# Altium PCB NB_BaseStation.PcbDoc
Units mm, origin at the board's own origin, x right, y up, seen from the top; angles counter-clockwise.
Board outline 62 x 30 mm, 2 copper layers (Top Layer, Bottom Layer); 29 components, 24 nets, 54 pads, 21 vias.
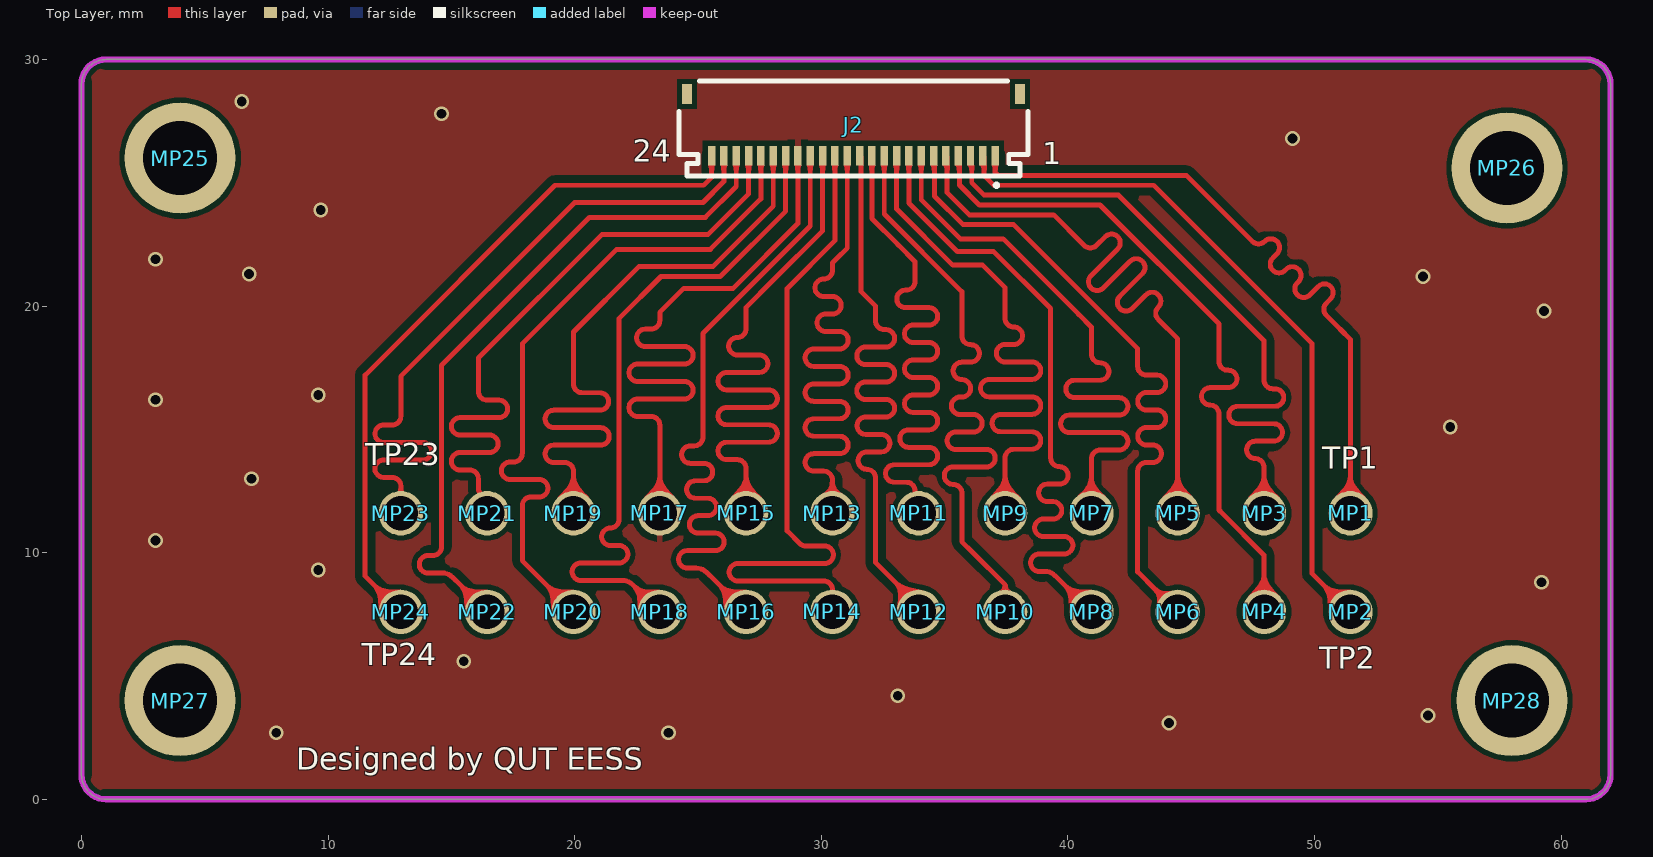
[diagram p0: Top Layer view]
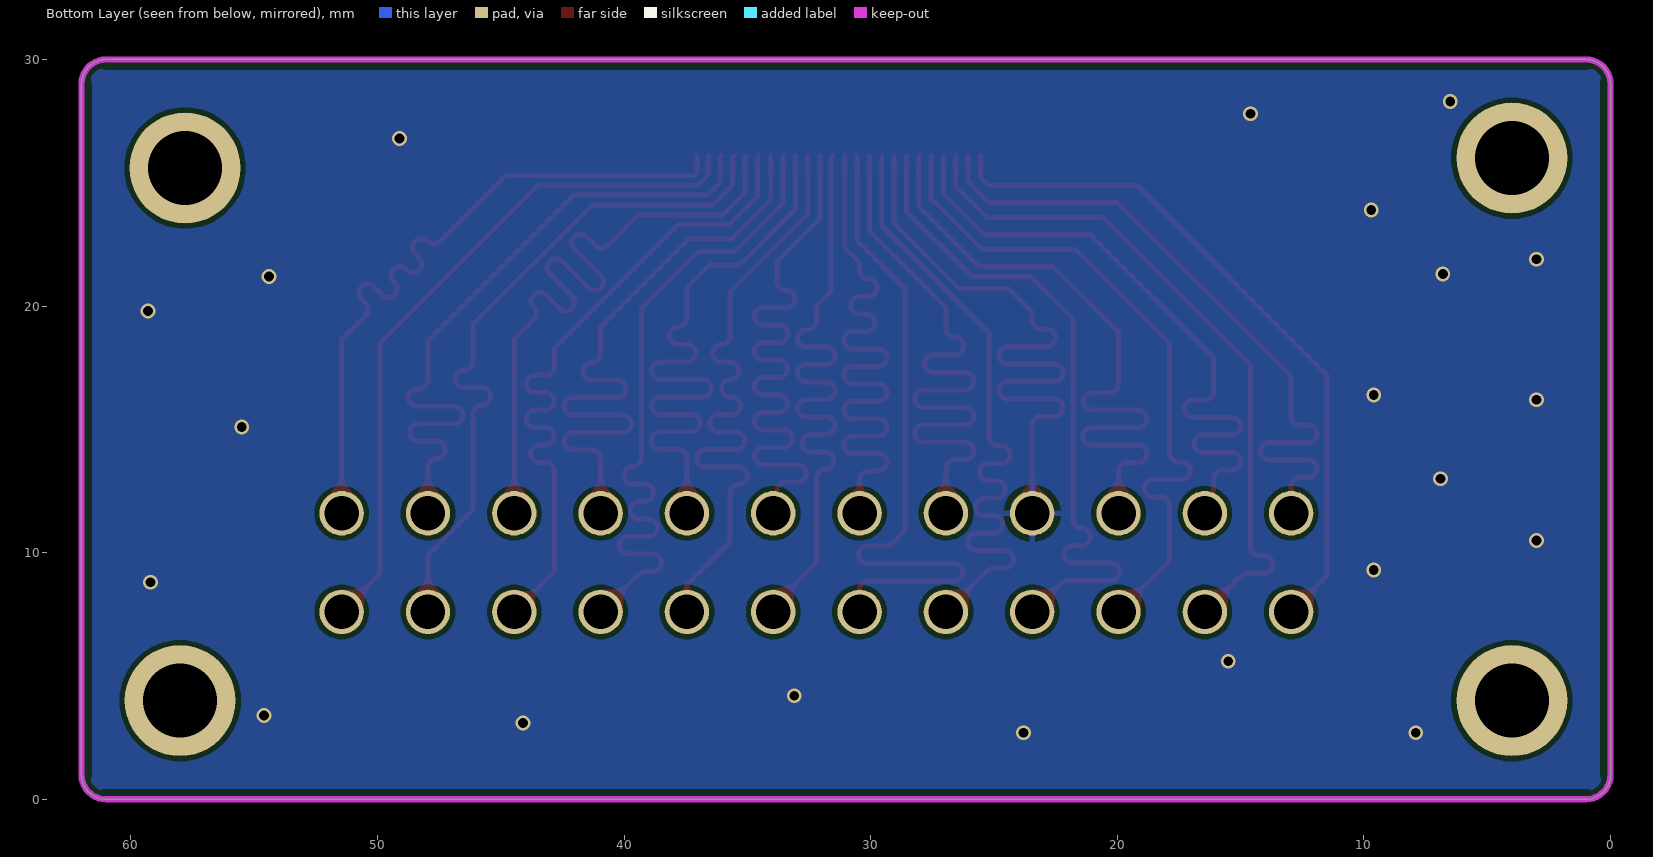
[diagram p1: Bottom Layer view, seen from below]

## Layer stack, top to bottom
Top Solder: solder mask 0.0102, Solder Resist, Dk 3.5
Top Layer: signal copper 0.0356
Dielectric 1: dielectric 0.32, FR-4, Dk 4.8
Bottom Layer: signal copper 0.0356
Bottom Solder: solder mask 0.0102, Solder Resist, Dk 3.5

## Board outline
0,1 ccw(c1,1) 1,0 61,0 ccw(c61,1) 62,1 62,29 ccw(c61,29) 61,30 1,30 ccw(c1,29) 0,29

## Design rules (kind name [scope] priority, off if disabled: settings)
Clearance Clearance_1 [All] p1: gap=0.2 ignorepadtopadclearanceinfootprint=FALSE except(0.3: Track-Poly)
HoleSize [All] p1: absolutevalues=TRUE maxlimit=3 minlimit=0.025 maxpercent=80.000 minpercent=20.000
PolygonConnect [All] p1: thpad.connectstyle=Relief thpad.reliefconductorwidth=0.254 thpad.reliefentries=4 thpad.polygonreliefangle="90 Angle" thpad.airgapwidth=0.254 smdpad.connectstyle=Relief smdpad.reliefconductorwidth=0.254 smdpad.reliefentries=4 smdpad.polygonreliefangle="90 Angle" smdpad.airgapwidth=0.254 via.connectstyle=Direct via.reliefconductorwidth=0.254 via.reliefentries=4 via.polygonreliefangle="90 Angle" via.airgapwidth=0.254
RoutingVias [All] p1: holewidth=0.711 width=1.27 viastyle="Through Hole" minholewidth=0.3 minwidth=0.6 maxholewidth=0.711 maxwidth=1.27
SilkToSolderMaskClearance [IsPad] p1: minsilkscreentomaskgap=0.1 clearancetoexposedcopper=TRUE
SolderMaskExpansion [All] p1: expansion=0.102 istentingtop=FALSE
Width [All] p1: maxlimit=2 minlimit=0.2 preferedwidth=0.2 minimp=50.000000 maximp=50.000000 favimp=50.000000
28 further rules are at their usual default settings.

## Components (designator, comment, footprint, x,y, rotation, side; value= is the part's Value field where it differs from the comment)
J2 "687124182122" 687124182122 31.3,27.2 r180 top
MP1 "PH-MVS-4355" PH-MVS-4355 51.45,11.6 r0 top
MP2 "PH-MVS-4355" PH-MVS-4355 51.45,7.6 r0 top
MP3 "PH-MVS-4355" PH-MVS-4355 47.95,11.6 r0 top
MP4 "PH-MVS-4355" PH-MVS-4355 47.95,7.6 r0 top
MP5 "PH-MVS-4355" PH-MVS-4355 44.45,11.6 r0 top
MP6 "PH-MVS-4355" PH-MVS-4355 44.45,7.6 r0 top
MP7 "PH-MVS-4355" PH-MVS-4355 40.95,11.6 r0 top
MP8 "PH-MVS-4355" PH-MVS-4355 40.95,7.6 r90 top
MP9 "PH-MVS-4355" PH-MVS-4355 37.45,11.6 r90 top
MP10 "PH-MVS-4355" PH-MVS-4355 37.45,7.6 r90 top
MP11 "PH-MVS-4355" PH-MVS-4355 33.95,11.6 r90 top
MP12 "PH-MVS-4355" PH-MVS-4355 33.95,7.6 r90 top
MP13 "PH-MVS-4355" PH-MVS-4355 30.45,11.6 r90 top
MP14 "PH-MVS-4355" PH-MVS-4355 30.45,7.6 r90 top
MP15 "PH-MVS-4355" PH-MVS-4355 26.95,11.6 r90 top
MP16 "PH-MVS-4355" PH-MVS-4355 26.95,7.6 r90 top
MP17 "PH-MVS-4355" PH-MVS-4355 23.45,11.6 r90 top
MP18 "PH-MVS-4355" PH-MVS-4355 23.45,7.6 r90 top
MP19 "PH-MVS-4355" PH-MVS-4355 19.95,11.6 r90 top
MP20 "PH-MVS-4355" PH-MVS-4355 19.95,7.6 r90 top
MP21 "PH-MVS-4355" PH-MVS-4355 16.45,11.6 r90 top
MP22 "PH-MVS-4355" PH-MVS-4355 16.45,7.6 r90 top
MP23 "PH-MVS-4355" PH-MVS-4355 12.95,11.6 r90 top
MP24 "PH-MVS-4355" PH-MVS-4355 12.95,7.6 r90 top
MP25 "M3_Mouting_Hole" M3_Mouting_Hole#1 4,26 r0 top
MP26 "M3_Mouting_Hole" M3_Mouting_Hole#2 58,26 r0 top
MP27 "M3_Mouting_Hole" M3_Mouting_Hole#1 4,4 r0 top
MP28 "M3_Mouting_Hole" M3_Mouting_Hole#1 58,4 r0 top

## Footprints (in the part's own frame and the unit in brackets; to place one, negate y for a bottom-side part, rotate by r counter-clockwise, add the part's x,y. Pads: shape width x height; smd on the part's side, far side on the other; paste and mask are expansions set on the pad)
687124182122 [mm] "ZIF Connectors, Horizontal, Dual Contact Back Locking, pitch 0.5mm, 24p"
  rect 0.3x0.8 smd: 1(-5.75,1.1) 2(-5.25,1.1) 3(-4.75,1.1) 4(-4.25,1.1) 5(-3.75,1.1) 6(-3.25,1.1) 7(-2.75,1.1) 8(-2.25,1.1) 9(-1.75,1.1) 10(-1.25,1.1) 11(-0.75,1.1) 12(-0.25,1.1) 13(0.25,1.1) 14(0.75,1.1) 15(1.25,1.1) 16(1.75,1.1) 17(2.25,1.1) 18(2.75,1.1) 19(3.25,1.1) 20(3.75,1.1) 21(4.25,1.1) 22(4.75,1.1) 23(5.25,1.1) 24(5.75,1.1)
  rect 0.4x0.8 smd: M1(-6.75,-1.4) M2(6.75,-1.4)
  silkscreen extent -7.07,-1.92 7.08,2.37, body extent -7,-1.85 7,1.85, height 0.98
M3_Mouting_Hole#1 [mm]
  round 4.5 hole 3: ""(0,0)
M3_Mouting_Hole#2 [mm]
  round 4.5 hole 3: ""(-0.2,-0.4)
PH-MVS-4355 [mm]
  round 1.8 hole 1.4: 1(0,0)
  body extent -0.99,-1 0.99,1, height 7

## Part data
J2: "WR-FPC SMT ZIF Horizontal Dual Contact, pitch 0.5mm, Horizontal, 24pins", Contact Resistance=30mΩ, Manufacturer="Wurth Elektronik", Operating Temperature Max=85°C, Operating Temperature Min=-55°C, Rated Current=0.5A, Working Voltage=50VAC, Category="FPC Connectors", ComponentLink1Description="Website Link", ComponentLink1URL=https://www.we-online.com/redexpert/article/687124182122?ad, ComponentLink2Description="Datasheet Link", ComponentLink2URL=https://www.we-online.com/redexpert/spec/687124182122?ad, Height=0.96mm, Length=14mm, Manufacturer Part Number=687124182122, Match Code=WR-FPC, Mount="Surface Mount", Number of Pins=24, Orientation=Horizontal, Packaging="Tape and Reel", Pitch=0.5mm, Width=3.7mm
MP1 MP2 MP3 MP4 MP5 MP6 MP7 MP8 MP9 MP10 MP11 MP12 MP13 MP14 MP15 MP16 MP17 MP18 MP19 MP20 MP21 MP22 MP23 MP24: "Pogo Pin CONTACT SPRING LOADED SLDR CUP"

## Via types
v1: diameter 0.6, hole 0.4, Top Layer to Bottom Layer, 21 vias

## Nets (pads, with @x,y where several pads share a name; then routed paths per layer and width w, separated by ;. In a path a pad name is that pad's centre, name@x,y a point inside that pad or via, vN(x,y) a via of type N, cw(c..) or ccw(c..) an arc to the next point about the centre after c; other vN are vias at no path point)
1-NC: J2.1 MP1.1 | length 28.5
  Top Layer w0.2: J2.1 37.05,25.417 37.167,25.3 44.8,25.3 46.797,23.303 46.868,23.232 47.475,22.625 ccw(c47.725,22.875) 47.975,22.625 cw(c48.226,22.375) 48.476,22.625 cw(c48.226,22.375) 48.476,22.125 48.304,21.952 ccw(c48.554,21.702) 48.304,21.452 ccw(c48.554,21.702) 48.805,21.452 48.846,21.493 cw(c49.097,21.243) 49.347,21.493 cw(c49.097,21.243) 49.347,20.993 49.305,20.951 ccw(c49.556,20.701) 49.305,20.45 ccw(c49.556,20.701) 49.806,20.45 50.151,20.795 cw(c50.401,20.545) 50.651,20.795 cw(c50.401,20.545) 50.651,20.295 50.479,20.122 ccw(c50.729,19.872) 50.479,19.621 50.979,19.121 51.05,19.05 51.45,18.65 MP1.1
2-GDR: J2.2 MP2.1 | length 28.5
  Top Layer w0.2: J2.2 36.6,26.05 36.6,25.284 36.984,24.9 43.478,24.9 49.9,18.478 49.9,9.15 MP2.1
3-RESE: J2.3 MP3.1 | length 28.5
  Top Layer w0.2: J2.3 36.1,26.05 36.1,25.001 36.601,24.5 42.05,24.5 47.95,18.6 47.95,17.1 47.95,17 ccw(c48.304,17) 48.304,16.646 48.396,16.646 cw(c48.396,16.292) 48.396,15.938 46.876,15.938 ccw(c46.876,15.584) 46.876,15.23 48.345,15.23 cw(c48.345,14.876) 48.345,14.522 47.596,14.522 ccw(c47.596,14.168) 47.596,13.814 cw(c47.596,13.46) 47.95,13.46 47.95,12.1 MP3.1
4-NC: J2.4 MP4.1 | length 28.5
  Top Layer w0.2: J2.4 35.6,26.05 35.6,24.908 36.408,24.1 41.3,24.1 46.122,19.278 46.122,17.854 46.122,17.754 ccw(c46.476,17.754) 46.476,17.4 46.5,17.4 cw(c46.5,17.046) 46.5,16.692 45.768,16.692 ccw(c45.768,16.338) 45.768,15.984 cw(c45.768,15.63) 46.122,15.63 46.122,11.731 46.277,11.576 47.95,9.903 MP4.1
5-VSH2: J2.5 MP5.1 | length 28.5
  Top Layer w0.2: J2.5 35.1,26.05 35.1,24.6 36,23.7 39.419,23.7 40.588,22.531 40.658,22.46 ccw(c40.909,22.711) 41.159,22.46 41.516,22.817 cw(c41.767,22.567) 42.017,22.817 cw(c41.767,22.567) 42.017,22.317 40.933,21.233 ccw(c41.183,20.983) 40.933,20.733 ccw(c41.183,20.983) 41.434,20.733 42.517,21.816 cw(c42.768,21.566) 43.018,21.816 cw(c42.768,21.566) 43.018,21.316 42.104,20.402 ccw(c42.354,20.151) 42.104,19.901 ccw(c42.354,20.151) 42.605,19.901 43.162,20.458 cw(c43.412,20.208) 43.662,20.458 cw(c43.412,20.208) 43.662,19.957 ccw(c43.913,19.707) 43.662,19.457 44.45,18.669 44.45,17.293 MP5.1
6-SCL-T: J2.6 MP6.1 | length 28.5
  Top Layer w0.2: J2.6 34.582,26.068 34.582,24.466 35.748,23.3 37.8,23.3 42.827,18.273 42.827,17.656 42.827,17.556 ccw(c43.181,17.556) 43.181,17.202 43.613,17.202 cw(c43.613,16.848) 43.613,16.494 43.181,16.494 ccw(c43.181,16.14) 43.181,15.786 43.613,15.786 cw(c43.613,15.432) 43.613,15.078 43.181,15.078 ccw(c43.181,14.724) 43.181,14.37 43.437,14.37 cw(c43.437,14.016) 43.437,13.662 43.181,13.662 ccw(c43.181,13.308) 42.827,13.308 42.827,9.223 43.55,8.5 MP6.1
7-SDA-T: J2.7 MP7.1 | length 28.5
  Top Layer w0.2: J2.7 34.05,24.31 35.633,22.727 37.373,22.727 40.434,19.666 40.95,19.15 40.95,18.056 ccw(c41.304,18.056) 41.304,17.702 cw(c41.304,17.348) 41.304,16.994 40.267,16.994 ccw(c40.267,16.64) 40.267,16.286 42.073,16.286 cw(c42.073,15.932) 42.073,15.578 40.054,15.578 ccw(c40.054,15.224) 40.054,14.87 42.073,14.87 cw(c42.073,14.516) 42.073,14.162 41.304,14.162 ccw(c41.304,13.808) 40.95,13.808 40.95,13 MP7.1
8-BS1: J2.8 MP8.1 | length 28.5
  Top Layer w0.2: J2.8 33.55,24.181 35.522,22.209 36.991,22.209 39.3,19.9 39.3,19.328 39.3,13.842 ccw(c39.654,13.842) 39.654,13.488 cw(c39.654,13.134) 39.654,12.78 39.163,12.78 ccw(c39.163,12.426) 39.163,12.072 39.396,12.072 cw(c39.396,11.718) 39.396,11.364 39.004,11.364 ccw(c39.004,11.01) 39.004,10.656 39.843,10.656 cw(c39.843,10.302) 39.843,9.948 38.838,9.948 ccw(c38.838,9.594) 38.838,9.24 39.06,9.24 cw(c39.06,8.635) 39.487,9.063 39.587,8.963 MP8.1
9-BUSY: J2.9 MP9.1 | length 28.5
  Top Layer w0.2: J2.9 33.05,23.941 35.331,21.66 36.54,21.66 37.45,20.75 37.45,20.593 37.45,19.506 ccw(c37.804,19.506) 37.804,19.152 cw(c37.804,18.798) 37.804,18.444 37.45,18.444 ccw(c37.45,18.09) 37.45,17.736 38.543,17.736 cw(c38.543,17.382) 38.543,17.028 36.808,17.028 ccw(c36.808,16.674) 36.808,16.32 38.543,16.32 cw(c38.543,15.966) 38.543,15.612 37.275,15.612 ccw(c37.275,15.258) 37.275,14.904 38.543,14.904 cw(c38.543,14.55) 38.543,14.196 37.804,14.196 ccw(c37.804,13.842) 37.45,13.842 37.45,11.618 MP9.1
10-RES#: J2.10 MP10.1 | length 28.5
  Top Layer w0.2: J2.10 32.55,23.733 35.7,20.583 35.7,18.788 ccw(c36.054,18.788) 36.054,18.434 cw(c36.054,18.08) 36.054,17.726 35.7,17.726 ccw(c35.7,17.372) 35.7,17.018 ; 35.7,17.018 cw(c35.7,16.664) 35.7,16.31 35.629,16.31 ccw(c35.629,15.956) 35.629,15.602 36.167,15.602 cw(c36.167,15.248) 36.167,14.894 35.453,14.894 ccw(c35.453,14.54) 35.453,14.186 36.696,14.186 cw(c36.696,13.832) 36.696,13.478 35.338,13.478 ccw(c35.338,13.124) 35.338,12.77 35.346,12.77 cw(c35.346,12.416) 35.7,12.416 35.7,10.9 35.7,10.45 36.143,10.007 37.45,8.7 MP10.1
11-D/C#: J2.11 MP11.1 | length 28.5
  Top Layer w0.2: J2.11 32.05,23.55 33.116,22.484 33.8,21.8 33.8,21 cw(c33.446,21) 33.446,20.646 33.412,20.646 ccw(c33.412,20.292) 33.412,19.938 34.363,19.938 cw(c34.363,19.584) 34.363,19.23 33.725,19.23 ccw(c33.725,18.876) 33.725,18.522 34.363,18.522 cw(c34.363,18.168) 34.363,17.814 33.725,17.814 ccw(c33.725,17.46) 33.725,17.106 34.363,17.106 cw(c34.363,16.752) 34.363,16.398 33.725,16.398 ccw(c33.725,16.044) 33.725,15.69 34.363,15.69 cw(c34.363,15.336) 34.363,14.982 33.536,14.982 ccw(c33.536,14.628) 33.536,14.274 34.363,14.274 cw(c34.363,13.92) 34.363,13.566 32.954,13.566 ccw(c32.954,13.212) 32.954,12.858 33.446,12.858 cw(c33.446,12.504) 33.8,12.504 33.8,12.404 33.8,11.75 MP11.1
12-CS#: J2.12 MP12.1 | length 28.5
  Top Layer w0.2: J2.12 31.6,26.05 31.6,25.683 31.6,20.6 32.2,20 32.2,19.5 32.2,19.4 ccw(c32.554,19.4) 32.554,19.046 32.617,19.046 cw(c32.617,18.692) 32.617,18.338 31.791,18.338 ccw(c31.791,17.984) 31.791,17.63 32.617,17.63 cw(c32.617,17.276) 32.617,16.922 31.789,16.922 ccw(c31.789,16.568) 31.789,16.214 32.617,16.214 cw(c32.617,15.86) 32.617,15.506 31.801,15.506 ccw(c31.801,15.152) 31.801,14.798 32.428,14.798 cw(c32.428,14.444) 32.428,14.09 31.846,14.09 ccw(c31.846,13.736) 31.846,13.382 cw(c31.846,13.028) 32.2,13.028 32.2,11.8 32.2,9.6 33.95,7.85 MP12.1
13-SCL: J2.13 MP13.1 | length 28.5
  Top Layer w0.2: MP13.1 30.45,12.853 30.45,12.953 ccw(c30.096,12.953) 30.096,13.307 29.696,13.307 cw(c29.696,13.661) 29.696,14.015 30.735,14.015 ccw(c30.735,14.369) 30.735,14.723 29.696,14.723 cw(c29.696,15.077) 29.696,15.431 30.735,15.431 ccw(c30.735,15.785) 30.735,16.139 29.696,16.139 cw(c29.696,16.493) 29.696,16.847 30.735,16.847 ccw(c30.735,17.201) 30.735,17.555 29.696,17.555 cw(c29.696,17.909) 29.696,18.263 30.735,18.263 ccw(c30.735,18.617) 30.735,18.971 30.178,18.971 cw(c30.178,19.325) 30.178,19.679 30.45,19.679 ccw(c30.45,20.033) 30.45,20.387 30.096,20.387 cw(c30.096,20.741) 30.096,21.095 ccw(c30.096,21.449) 30.45,21.449 30.45,21.75 30.612,21.912 31.05,22.35 J2.13
14-SDA: J2.14 MP14.1 | length 28.5
  Top Layer w0.2: MP14.1 30.45,8.4 30.45,8.5 ccw(c30.096,8.5) 30.096,8.854 26.616,8.854 cw(c26.616,9.208) 26.616,9.562 30.134,9.562 ccw(c30.134,9.916) 30.134,10.27 29.377,10.27 cw(c29.377,10.624) 29.126,10.374 28.616,10.884 28.616,14.4 28.616,20.716 30.55,22.65 J2.14
15-VDDIO: J2.15 MP15.1 | length 28.5
  Top Layer w0.2: MP15.1 26.95,13.318 26.95,13.418 ccw(c26.596,13.418) 26.596,13.772 26.162,13.772 cw(c26.162,14.126) 26.162,14.48 27.862,14.48 ccw(c27.862,14.834) 27.862,15.188 26.162,15.188 cw(c26.162,15.542) 26.162,15.896 27.862,15.896 ccw(c27.862,16.25) 27.862,16.604 26.162,16.604 cw(c26.162,16.958) 26.162,17.312 27.482,17.312 ccw(c27.482,17.666) 27.482,18.02 26.596,18.02 cw(c26.596,18.374) 26.596,18.728 ccw(c26.596,19.082) 26.95,19.082 26.95,19.95 28.037,21.037 30.05,23.05 J2.15
16-VCI: J2.16 MP16.1 | length 28.5
  Top Layer w0.2: MP16.1 25.45,9.1 25.35,9.2 ccw(c24.923,8.773) 24.923,9.377 24.563,9.377 cw(c24.563,9.731) 24.563,10.085 25.706,10.085 ccw(c25.706,10.439) 25.706,10.793 25.004,10.793 cw(c25.004,11.147) 25.004,11.501 25.396,11.501 ccw(c25.396,11.855) 25.396,12.209 24.892,12.209 cw(c24.892,12.563) 24.892,12.917 25.243,12.917 ccw(c25.243,13.271) 25.243,13.625 24.689,13.625 cw(c24.689,13.979) 24.689,14.333 24.846,14.333 ccw(c24.846,14.687) 25.2,14.687 25.2,18.1 25.2,18.9 29.55,23.25 J2.16
17-GND: J2.17 MP17.1 | length 28.5
  Top Layer w0.2: MP17.1 23.45,15.072 23.45,15.172 ccw(c23.096,15.172) 23.096,15.526 22.554,15.526 cw(c22.554,15.88) 22.554,16.234 24.446,16.234 ccw(c24.446,16.588) 24.446,16.942 22.554,16.942 cw(c22.554,17.296) 22.554,17.65 24.446,17.65 ccw(c24.446,18.004) 24.446,18.358 22.861,18.358 cw(c22.861,18.712) 22.861,19.066 23.096,19.066 ccw(c23.096,19.42) 23.45,19.42 23.45,19.75 23.614,19.914 24.421,20.721 26.421,20.721 29.05,23.35 J2.17
  other v1: 7.9,2.7 23.8,2.7 44.1,3.1 54.6,3.4 33.1,4.2 15.5,5.6 59.2,8.8 9.6,9.3 3,10.5 6.9,13 55.5,15.1 3,16.2 9.6,16.4 59.3,19.8 54.4,21.2 6.8,21.3 3,21.9 9.7,23.9 49.1,26.8 14.6,27.8 6.5,28.3
18-VDD: J2.18 MP18.1 | length 28.5
  Top Layer w0.2: MP18.1 22.45,8.6 22.35,8.7 ccw(c21.923,8.273) 21.923,8.877 20.246,8.877 cw(c20.246,9.231) 20.246,9.585 21.8,9.585 ccw(c21.8,9.939) 21.8,10.293 21.446,10.293 cw(c21.446,10.647) 21.446,11.001 ccw(c21.446,11.355) 21.8,11.355 21.8,17.5 21.8,19.5 23.5,21.2 25.9,21.2 28.55,23.85 J2.18
19-VPP: J2.19 MP19.1 | length 28.5
  Top Layer w0.2: MP19.1 19.95,13.2 19.95,13.3 ccw(c19.596,13.3) 19.596,13.654 19.152,13.654 cw(c19.152,14.008) 19.152,14.362 21.046,14.362 ccw(c21.046,14.716) 21.046,15.07 19.152,15.07 cw(c19.152,15.424) 19.152,15.778 21.022,15.778 ccw(c21.022,16.132) 21.022,16.486 20.304,16.486 cw(c20.304,16.84) 19.95,16.84 19.95,18.3 19.95,18.95 22.6,21.6 25.6,21.6 28.05,24.05 J2.19
20-VSH1: J2.20 MP20.1 | length 28.5
  Top Layer w0.2: MP20.1 17.934,9.616 17.875,9.675 17.875,11.1 17.875,11.908 cw(c18.229,11.908) 18.229,12.262 18.561,12.262 ccw(c18.561,12.616) 18.561,12.97 17.383,12.97 cw(c17.383,13.324) 17.383,13.678 17.521,13.678 ccw(c17.521,14.032) 17.875,14.032 17.875,18.2 17.875,18.475 21.7,22.3 25.5,22.3 27.55,24.35 J2.20
21-VGH: J2.21 MP21.1 | length 28.5
  Top Layer w0.2: MP21.1 16.144,11.906 16.144,12.467 16.094,12.517 16.094,12.9 16.094,13 ccw(c15.74,13) 15.74,13.354 15.354,13.354 cw(c15.354,13.708) 15.354,14.062 16.539,14.062 ccw(c16.539,14.416) 16.539,14.77 15.354,14.77 cw(c15.354,15.124) 15.354,15.478 16.927,15.478 ccw(c16.927,15.832) 16.927,16.186 16.448,16.186 cw(c16.448,16.54) 16.094,16.54 16.094,17.5 16.094,17.894 21.1,22.9 25.4,22.9 27.05,24.55 J2.21
22-VSL: J2.22 MP22.1 | length 28.5
  Top Layer w0.2: MP22.1 15.15,8.9 15.05,9 ccw(c14.623,8.573) 14.623,9.177 14.051,9.177 cw(c14.051,9.531) 14.051,9.885 14.246,9.885 ccw(c14.246,10.239) 14.6,10.239 14.6,17 14.6,17.6 20.6,23.6 25.3,23.6 26.55,24.85 J2.22
23-VGL: J2.23 MP23.1 | length 28.5
  Top Layer w0.2: MP23.1 12.95,12.6 12.95,12.7 ccw(c12.596,12.7) 12.596,13.054 12.254,13.054 cw(c12.254,13.408) 12.254,13.762 13.846,13.762 ccw(c13.846,14.116) 13.846,14.47 12.255,14.47 cw(c12.255,14.824) 12.255,15.178 12.596,15.178 ccw(c12.596,15.532) 12.95,15.532 12.95,17.135 12.95,17.15 20,24.2 25.2,24.2 26.05,25.05 J2.23
24-VCOM: J2.24 MP24.1 | length 28.5
  Top Layer w0.2: MP24.1 11.5,9.05 11.5,17.2 19.2,24.9 25.233,24.9 25.55,25.217 J2.24
pads on no net: J2.M1 J2.M2 MP25. MP26. MP27. MP28.

## Polygon pours and split planes (outlines as drawn)
17-GND on Top Layer "17-GND_L01_P000" (solid, pour order 0): -0.1,0 -0.1,30 62,30 62,0
17-GND on Bottom Layer "17-GND_L02_P001" (solid, pour order 1): -0.1,0 -0.1,30 62,30 62,0

## Keep-outs
Keep-Out Layer:
  lines w0.254: 0,29 cw(c1,29) 1,30 61,30 cw(c61,29) 62,29 62,1 cw(c61,1) 61,0 1,0 cw(c1,1) 0,1 0,29.1

## Silkscreen, mask and mechanical layers (free items; w line width, h text height)
Top Overlay:
  text "24" at 22.35,25.55 h1.52
  text "1" at 38.965,25.451 h1.52
  text "TP23" at 11.502,13.245 h1.52
  text "TP1" at 50.315,13.101 h1.52
  text "TP24" at 11.375,5.124 h1.52
  text "TP2" at 50.188,4.997 h1.52
  text "Designed by QUT EESS" at 8.7,0.9 h1.52
Mechanical 1:
  lines w0.254: 0,29 cw(c1,29) 1,30 61,30 cw(c61,29) 62,29 62,1 cw(c61,1) 61,0 1,0 cw(c1,1) 0,1 0,29.1

## Dimensions
4,26 to 1,30 on Mechanical 2
4,4 to 1,0 on Mechanical 2
12.95,7.6 to 1,0 on Mechanical 2
12.95,11.6 to 12.95,7.6 on Mechanical 2
58,4 to 62,1 on Mechanical 2
4,4 to 0,1 on Mechanical 2
51.45,7.6 to 62,1 on Mechanical 2
12.95,7.6 to 0,1 on Mechanical 2
12.95,7.6 to 51.45,7.6 on Mechanical 2
12.95,7.6 to 16.45,7.6 on Mechanical 2
0.5,0 to 1,30 on Mechanical 2
0,0 to 62,1 on Mechanical 2